# EAGLE board POC (EAGLE 7.6.0)
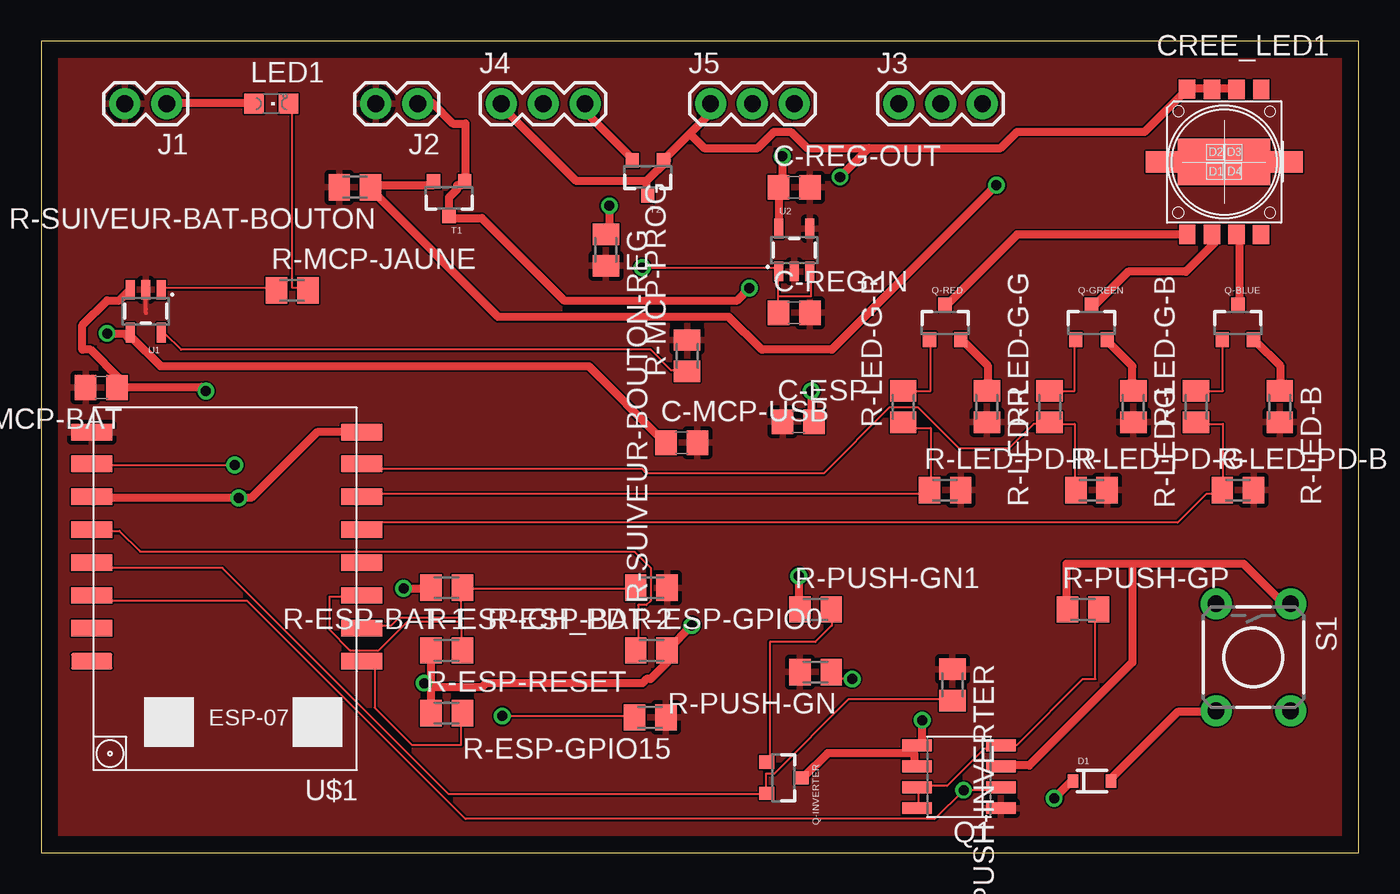
[diagram p0: board, top side]
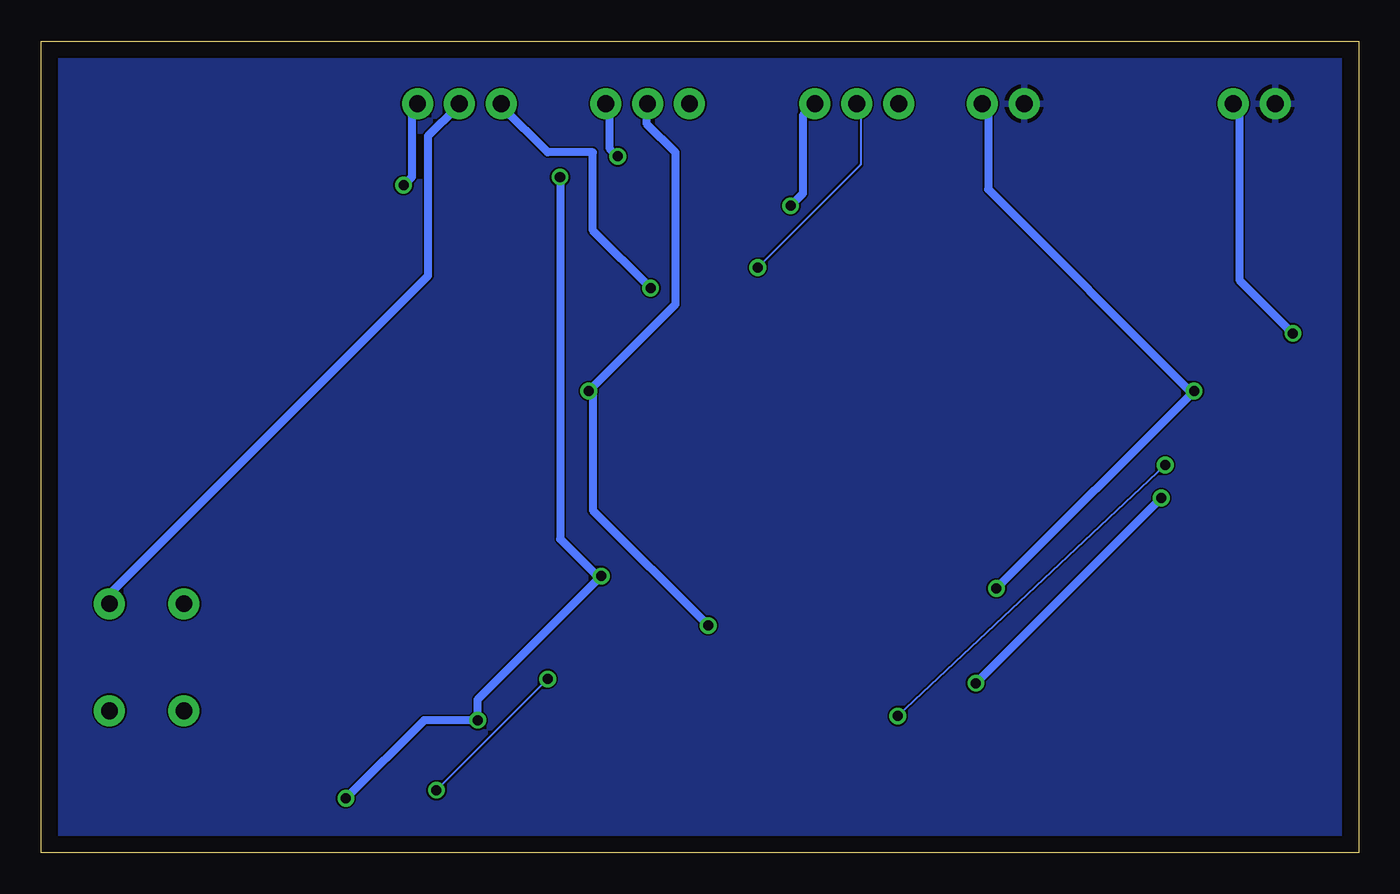
[diagram p1: board, bottom side, seen from below]

Size 80 x 49.3 mm. Coordinates in mm from the lower left corner, seen from the top.
Outline: 0,0 80,0 80,49.3 0,49.3 0,0
Copper layers (1*16): Top 0.035mm / dielectric 1.5mm / Bottom 0.035mm
Design rules "baballe": minimum track width 5mil, minimum drill 24mil, track to track 4mil, track to pad 4mil, pad to pad 4mil, via to via 4mil, smd to smd 2mil, copper to edge 40mil, drill to drill 8mil, minimum pad ring 10mil, minimum via ring 8mil, stop-mask expansion 4mil, vias tented up to drill 0mil, thermal gap 10mil
Net classes: 1 SUPPLY: width 0.5 mm, drill 0.2 mm, clearance 0.5 mm

## Footprints (pad centres in the part's own frame; a part is rotated, then mirrored left to right if it is on the bottom)
C0805 = smd 1.3 x 1.5: 1 -0.95,0; 2 0.95,0
CREE_XL_MCE = smd 1 x 1.16: 1 -2.24,4.42; 2 -0.739,4.408; 3 0.739,4.408; 4 2.256,4.408; 5 2.246,-4.408; 6 0.749,-4.399; 7 -0.739,-4.399; 8 -2.237,-4.399 | smd 5.6 x 2.84: HT 0,0 | smd 2 x 1.3: P$9 3.778,0; P$10 -3.767,0
SOD-323 = smd 0.63 x 0.83: A 1.15,0; C -1.15,0
1X02 = drill 1.016 pad 1.88: 1 0,0; 2 2.54,0
1X03 = drill 1.016 pad 1.88: 1 0,0; 2 2.54,0; 3 5.08,0
CHIPLED_0805 = smd 1.2 x 1.2: A 0,-1.05; C 0,1.05
SO08-IRF = smd 0.72 x 1.78: 1 -1.905,-2.543; 2 -0.635,-2.543; 3 0.635,-2.543; 4 1.905,-2.543; 5 1.905,2.543; 6 0.635,2.543; 7 -0.635,2.543; 8 -1.905,2.543
SOT23-3 = smd 0.8 x 0.9: 1 -0.95,-1; 2 0.95,-1; 3 0,1.1
M0805 = smd 1.3 x 1.6: 1 -0.95,0; 2 0.95,0
TACTILE-PTH = drill 1.016 pad 1.88: 1 -3.251,2.261; 2 3.251,2.261; 3 -3.251,-2.261; 4 3.251,-2.261
SOT23-5 = smd 0.55 x 1.2: 1 -0.95,-1.3; 2 0,-1.3; 3 0.95,-1.3; 4 0.95,1.3; 5 -0.95,1.3
ESP07-16PIN = smd 2.5 x 1: ADC -8.2,3.8; CH_PD -8.2,1.8; GND 8.2,-8.105; GPIO0 8.2,-2.2; GPIO2 8.2,-4.2; GPIO4 8.2,1.8; GPIO5 8.2,-0.2; GPIO12 -8.2,-4.2; GPIO13 -8.2,-6.2; GPIO14 -8.2,-2.2; GPIO15 8.2,-6.2; GPIO16 -8.2,-0.2; REST -8.2,5.8; RX 8.2,3.8; TX 8.2,5.8; VCC -8.2,-8.105

## Placement (x,y rotation side)
C-ESP  100nF  [C0805]  45.97,26.18 0 top
C-MCP-BAT  100nF  [C0805]  3.65,28.26 180 top
C-MCP-USB  100nF  [C0805]  38.89,24.91 0 top
C-REG-IN  1uF  [C0805]  45.72,32.8 0 top
C-REG-OUT  2.2uF  [C0805]  45.72,40.42 0 top
CREE_LED1  CREE_XL_MCE  [CREE_XL_MCE]  71.82,41.96 0 top
D1  250mA/100V  [SOD-323]  63.8,4.35 0 top
J1  USB  [1X02]  7.62,45.5 180 top
J2  BAT  [1X02]  22.86,45.5 180 top
J3  SELECTIONVPUSHIN  [1X03]  52.07,45.5 0 top
J4  SELECTIONVREGIN  [1X03]  27.94,45.5 0 top
J5  SELECTIONVCC  [1X03]  40.64,45.5 0 top
LED1  BAT  [CHIPLED_0805]  13.97,45.5 270 top
Q1  IRF7319  [SO08-IRF]  55.73,4.61 90 top
Q-BLUE  MOSFET-NCHANNELAO3404A  [SOT23-3]  72.66,32.18 0 top
Q-GREEN  MOSFET-NCHANNELAO3404A  [SOT23-3]  63.77,32.18 0 top
Q-INVERTER  MOSFET-PCHANNEL  [SOT23-3]  45.05,4.55 270 top
Q-RED  MOSFET-NCHANNELAO3404A  [SOT23-3]  54.88,32.18 0 top
R-ESP-BAT-1  10K  [M0805]  24.62,16.1 180 top
R-ESP-BAT-2  47K  [M0805]  37.05,16.1 180 top
R-ESP-CH_PD  10K  [M0805]  24.62,12.29 0 top
R-ESP-GPIO0  10K  [M0805]  37.05,12.29 0 top
R-ESP-GPIO15  10K  [M0805]  36.98,8.22 180 top
R-ESP-RESET  10K  [M0805]  24.62,8.48 0 top
R-LED-B  ?  [M0805]  75.2,27.1 270 top
R-LED-G  ?  [M0805]  66.31,27.1 270 top
R-LED-G-B  10K  [M0805]  70.12,27.1 90 top
R-LED-G-G  10K  [M0805]  61.23,27.1 90 top
R-LED-G-R  10K  [M0805]  52.34,27.1 90 top
R-LED-PD-B  10K  [M0805]  72.66,22.02 0 top
R-LED-PD-G  10K  [M0805]  63.77,22.02 0 top
R-LED-PD-R  10K  [M0805]  54.88,22.02 0 top
R-LED-R  ?  [M0805]  57.42,27.1 270 top
R-MCP-JAUNE  200  [M0805]  15.24,34.16 0 top
R-MCP-PROG  4.7K  [M0805]  39.22,30.19 90 top
R-PUSH-GN  10K  [M0805]  47.02,10.97 180 top
R-PUSH-GN1  10K  [M0805]  47.02,14.78 0 top
R-PUSH-GP  10K  [M0805]  63.26,14.78 0 top
R-PUSH-INVERTER  10K  [M0805]  55.33,10.2 270 top
R-SUIVEUR-BAT-BOUTON  470  [M0805]  19.05,40.42 180 top
R-SUIVEUR-BOUTON-REG  470  [M0805]  34.29,36.61 270 top
S1  SWITCH-MOMENTARY-2MOT  [TACTILE-PTH]  73.59,11.88 270 top
T1  SUIVEUR-BAT-BOUTON  [SOT23-3]  24.77,39.78 180 top
T2  SUIVEUR-BOUTON-REG  [SOT23-3]  36.83,41.05 180 top
U1  MCP73831  [SOT23-5]  6.35,32.89 180 top
U2  3.3V  [SOT23-5]  45.72,36.61 0 top
U$1  ESP07-16PIN  [ESP07-16PIN]  11.27,17.43 180 top

## Library data of the parts
C-ESP C-MCP-BAT C-MCP-USB C-REG-IN C-REG-OUT R-ESP-BAT-1 R-ESP-BAT-2 R-ESP-CH_PD R-ESP-GPIO0 R-ESP-GPIO15 R-ESP-RESET R-LED-B R-LED-G R-LED-G-B R-LED-G-G R-LED-G-R R-LED-PD-B R-LED-PD-G R-LED-PD-R R-LED-R R-MCP-JAUNE R-MCP-PROG R-PUSH-GN R-PUSH-GN1 R-PUSH-GP R-PUSH-INVERTER R-SUIVEUR-BAT-BOUTON R-SUIVEUR-BOUTON-REG = resistor
CREE_LED1 = CreeXL-MC-E
D1 = SparkFun-DiscreteSemi; PROD_ID: DIO-09646
J1-J5 = SparkFun-Connectors
LED1 = led
Q1 = lio
Q-BLUE Q-GREEN Q-RED = SparkFun-DiscreteSemi; PROD_ID: TRAN-12988
Q-INVERTER = SparkFun-DiscreteSemi; PROD_ID: TRANS-08285
S1 = SparkFun-Electromechanical
T1 T2 = SparkFun-DiscreteSemi; PROD_ID: TRANS-08049
U1 = SparkFun-PowerIC; PROD_ID: IC-09995
U2 = SparkFun-PowerIC; PROD_ID: VREG-12457
U$1 = esp8266modules; DIMENSIONS: 22.0 x 16.0 mm; PINS: 16; PITCH: 0.078" / 2 mm

## Nets
ADC: R-ESP-BAT-1.1 R-ESP-BAT-2.2 U$1.ADC
GND: C-ESP.1 C-MCP-BAT.2 C-MCP-USB.2 C-REG-IN.2 C-REG-OUT.2 J1.2 J2.2 Q1.1 R-ESP-BAT-2.1 R-ESP-GPIO15.1 R-LED-B.2 R-LED-G.2 R-LED-PD-B.2 R-LED-PD-G.2 R-LED-PD-R.2 R-LED-R.2 R-MCP-PROG.2 R-PUSH-GN.2 R-PUSH-INVERTER.1 R-SUIVEUR-BAT-BOUTON.2 R-SUIVEUR-BOUTON-REG.2 U1.2 U2.2 U2.4 U$1.GND
GPIO4: Q1.2 R-PUSH-GN.1 U$1.GPIO4
GPIO5: Q-INVERTER.2 R-PUSH-INVERTER.2 U$1.GPIO5
GPIO12: R-LED-G-R.1 R-LED-PD-R.1 U$1.GPIO12
GPIO13: R-LED-G-G.1 R-LED-PD-G.1 U$1.GPIO13
GPIO14: R-LED-G-B.1 R-LED-PD-B.1 U$1.GPIO14
N$1: R-ESP-GPIO15.2 U$1.GPIO15
N$2: R-ESP-GPIO0.1 U$1.GPIO0
N$4: R-ESP-CH_PD.2 U$1.CH_PD
N$5: R-ESP-RESET.2 U$1.REST
N$6: R-MCP-PROG.1 U1.5
N$7: R-MCP-JAUNE.1 U1.1
N$8: LED1.C R-MCP-JAUNE.2
N$9: Q1.4 Q1.7 Q1.8 R-PUSH-GP.2
N$10 [SUPPLY]: D1.A S1.4
N$11: Q-INVERTER.1 R-PUSH-GN1.2
N$12: C-REG-IN.1 J4.2 U2.1 U2.3
N$13 [SUPPLY]: CREE_LED1.8 Q-RED.3
N$14 [SUPPLY]: CREE_LED1.7 Q-GREEN.3
N$15 [SUPPLY]: CREE_LED1.6 Q-BLUE.3
N$18 [SUPPLY]: Q-BLUE.2 R-LED-B.1
N$19 [SUPPLY]: Q-GREEN.2 R-LED-G.1
N$20 [SUPPLY]: Q-RED.2 R-LED-R.1
N$21: Q-RED.1 R-LED-G-R.2
N$22: Q-GREEN.1 R-LED-G-G.2
N$23: Q-BLUE.1 R-LED-G-B.2
VBAT [SUPPLY]: C-MCP-BAT.1 J2.1 J3.1 R-ESP-BAT-1.2 T1.1 T1.3 U1.3
VBAT_S [SUPPLY]: J3.3 R-SUIVEUR-BAT-BOUTON.1 T1.2
VCC [SUPPLY]: C-REG-OUT.1 J5.3 U2.5
VCC-ESP [SUPPLY]: C-ESP.2 J5.2 R-ESP-CH_PD.1 R-ESP-GPIO0.2 R-ESP-RESET.1 U$1.GPIO2 U$1.VCC
VIN [SUPPLY]: CREE_LED1.1 CREE_LED1.2 CREE_LED1.3 D1.C J4.1 J5.1 Q1.5 Q1.6 Q-INVERTER.3 R-PUSH-GN1.1 T2.1 T2.3
VIN_S [SUPPLY]: J4.3 R-SUIVEUR-BOUTON-REG.1 T2.2
VPUSH_IN [SUPPLY]: J3.2 Q1.3 R-PUSH-GP.1 S1.1
VUSB [SUPPLY]: C-MCP-USB.1 J1.1 LED1.A U1.4

## Tracks (layer width: path | path; a pad name or v marks a point on that pad's centre or on a via)
ADC
  Top 0.127: U$1.ADC 19.5,13.8 21.25,13.8 21.75,14.3 25.5,14.3 25.5,16.05 R-ESP-BAT-1.1 25.75,16.05 36,16.05 R-ESP-BAT-2.2
GND
  Top 0.254: U1.2 6.35,32.8 6.35,33
  pour Bottom: 0,49.31 80.01,49.31 80.01,0 0,0
  pour Top: 0,49.31 80.01,49.31 80.01,0 0,0
GPIO4  (via drill 0.61)
  Top 0.127: v49.25,10.55 48.25,10.55 48,10.8 R-PUSH-GN.1 | Q1.2 58.25,3.8 v56,3.8 54.25,2.05 25.75,2.05 12.5,15.3 3.5,15.3 3.25,15.55 U$1.GPIO4
  Bottom 0.127: v56,3.8 v49.25,10.55
GPIO5
  Top 0.127: R-PUSH-INVERTER.2 55.25,9.3 49,9.3 44.5,4.8 44,4.8 44,3.8 Q-INVERTER.2 44,3.55 24.75,3.55 11,17.3 3.5,17.3 3.25,17.55 U$1.GPIO5
GPIO12
  Top 0.127: R-LED-G-R.1 52.5,26.05 52.75,25.8 54,25.8 54,22.05 R-LED-PD-R.1 53.75,21.8 19.5,21.8 U$1.GPIO12
  Top 0.254: R-LED-G-R.1
GPIO13
  Top 0.127: R-LED-PD-G.1 62.75,22.05 62.75,26.05 61.25,26.05 R-LED-G-G.1 61,26.05 60.25,26.05 58.75,24.55 55.75,24.55 53.25,27.05 51.5,27.05 47.5,23.05 36.75,23.05 36.5,23.3 19.75,23.3 19.5,23.55 U$1.GPIO13
GPIO14
  Top 0.127: R-LED-G-B.1 70.25,26.05 71.75,26.05 71.75,22.05 R-LED-PD-B.1 71.5,21.8 70.75,21.8 69,20.05 19.75,20.05 19.5,19.8 U$1.GPIO14
N$1  (via drill 0.61)
  Top 0.127: v28,8.3 36,8.3 R-ESP-GPIO15.2 | v11.75,23.55 3.25,23.55 U$1.GPIO15
  Bottom 0.127: v11.75,23.55 v28,8.3
N$2
  Top 0.127: R-ESP-GPIO0.1 36.25,12.3 36.25,15.05 36.75,15.05 37,15.3 37,17.3 36,18.3 6,18.3 4.75,19.55 3.25,19.55 U$1.GPIO0
N$4
  Top 0.127: R-ESP-CH_PD.2 25.5,12.3 25.5,14.05 22.25,14.05 20.5,12.3 18.75,12.3 17.5,13.55 17.5,15.55 19.25,15.55 U$1.CH_PD
N$5
  Top 0.127: R-ESP-RESET.2 25.5,8.3 25.5,6.55 22.5,6.55 20.25,8.8 20.25,11.55 19.5,11.55 U$1.REST
N$6
  Top 0.127: U1.5 7.5,31.55 8.5,30.55 37,30.55 38.25,29.3 39,29.3 R-MCP-PROG.1
N$7
  Top 0.127: U1.1 7.5,34.3 14.25,34.3 R-MCP-JAUNE.1
N$8
  Top 0.127: LED1.C 15.25,45.3 15.25,34.3 16,34.3 R-MCP-JAUNE.2
N$9
  Top 0.127: Q1.8 53.25,2.8 53.25,3.8 Q1.7 53.25,4.05 55,4.05 57.25,6.3 58.25,6.3 Q1.4 58.5,6.55 59.25,6.55 63.25,10.55 64,10.55 64,14.55 R-PUSH-GP.2
N$10
  Top 0.5: D1.A 65,4.55 69,8.55 71.25,8.55 S1.4
N$11
  Top 0.127: Q-INVERTER.1 44.25,5.55 44.25,12.8 47,12.8 48,13.8 48,14.55 R-PUSH-GN1.2
N$12  (via drill 0.61)
  Top 0.127: 44.75,33.8 44.75,32.8 C-REG-IN.1 | 44.75,33.8 44.75,35.3 U2.1 44.75,35.55 v36.5,35.55 | 44.75,33.8 46.75,33.8 46.75,35.3 U2.3
  Bottom 0.127: v36.5,35.55 30.25,41.8 30.25,45.3 J4.2
N$13
  Top 0.5: Q-RED.3 55,33.3 59.25,37.55 69.5,37.55 CREE_LED1.8
N$14
  Top 0.5: Q-GREEN.3 64,33.3 66,35.3 69.5,35.3 71.25,37.05 71.25,37.55 CREE_LED1.7
N$15
  Top 0.5: Q-BLUE.3 72.75,33.3 72.75,37.55 CREE_LED1.6
N$18
  Top 0.5: Q-BLUE.2 73.75,31.05 75.25,29.55 75.25,28.05 R-LED-B.1
N$19
  Top 0.5: Q-GREEN.2 64.75,31.05 66.25,29.55 66.25,28.05 R-LED-G.1
N$20
  Top 0.5: Q-RED.2 56,31.05 57.5,29.55 57.5,28.05 R-LED-R.1
N$21
  Top 0.127: R-LED-G-R.2 54,28.05 54,31.05 Q-RED.1
N$22
  Top 0.127: R-LED-G-G.2 62.75,28.05 62.75,31.05 Q-GREEN.1
N$23
  Top 0.127: R-LED-G-B.2 71.75,28.05 71.75,31.05 Q-BLUE.1
VBAT  (via drill 0.61)
  Top 0.5: U1.3 5.25,34.05 4.75,33.55 4,33.55 2.5,32.05 2.5,30.55 3,30.55 4.75,28.8 4.75,28.3 C-MCP-BAT.1 5,28.3 9.75,28.3 v10,28.05 | v22,16.05 23.5,16.05 R-ESP-BAT-1.2 | J2.1 23,45.55 23.75,45.55 25,44.3 25.75,44.3 25.75,40.8 T1.1 25.5,40.55 25.25,40.55 25.25,40.3 24.75,39.8 24.75,38.8 T1.3 25,38.55 26.75,38.55 31.75,33.55 42.25,33.55 v43,34.3
  Bottom 0.5: v22,16.05 v10,28.05 10.25,28.05 22.5,40.3 22.5,45.05 22.75,45.3 J2.1 | v43,34.3 46.5,37.8 46.5,42.55 49.25,42.55 52,45.3 J3.1
VBAT_S  (via drill 0.61)
  Top 0.5: T1.2 23.75,40.55 20,40.55 R-SUIVEUR-BAT-BOUTON.1 20,40.3 27.75,32.55 41.75,32.55 43.75,30.55 48,30.55 v58,40.55
  Bottom 0.5: v58,40.55 57.5,41.05 57.5,45.05 57.25,45.3 J3.3
VCC  (via drill 0.61)
  Top 0.5: U2.5 44.77,38.2 C-REG-OUT.1 45,40.55 v45,42.3
  Bottom 0.5: v45,42.3 45.5,42.8 45.5,45.3 J5.3
VCC-ESP  (via drill 0.61)
  Top 0.5: 23.67,10.3 R-ESP-CH_PD.1 | 23.67,10.3 23.67,10.05 | 23.67,10.05 R-ESP-RESET.1 | U$1.GPIO2 3.25,21.55 v12,21.55 12.75,21.55 16.75,25.55 19.25,25.55 U$1.VCC | v46.75,28.05 46.75,26.3 C-ESP.2 | v39.5,13.8 R-ESP-GPIO0.2 38,11.55 37,10.55 36.75,10.55 36.5,10.3 27,10.3 26.75,10.05 23.67,10.05 | 23.67,10.3 v23.25,10.3
  Bottom 0.5: J5.2 43.25,45.3 43.25,44.3 41.5,42.55 41.5,33.3 v46.75,28.05 46.5,28.05 46.5,20.8 v39.5,13.8 | v23.25,10.3 v12,21.55
VIN  (via drill 0.61)
  Top 0.5: CREE_LED1.3 72.39,46.45 71.12,46.45 CREE_LED1.2 70.8,46.45 69.85,46.45 CREE_LED1.1 69.5,46.3 67,43.8 59.25,43.8 58.25,42.8 50.25,42.8 | v61.5,3.3 62.5,4.3 D1.C | v53.5,8.05 53.5,6.55 53.25,6.55 Q1.5 53,6.3 52.88,6.18 | 52.88,6.18 52.75,6.05 47.75,6.05 46.25,4.55 Q-INVERTER.3 | v46,16.8 46,14.8 R-PUSH-GN1.1 | Q1.6 53,5.3 53,6.05 52.88,6.18 | 36.75,40.8 36.75,40.05 T2.3 | 36.75,40.8 38,42.05 T2.1 38,42.3 39.38,43.67 | 39.38,43.67 40.5,44.8 40.5,45.3 J5.1 | 50.25,42.8 46.5,42.8 45.5,43.8 44.5,43.8 43.5,42.8 40.25,42.8 39.38,43.67 | 36.75,40.8 32.5,40.8 28,45.3 J4.1 | 50.25,42.8 v48.5,41.05
  Bottom 0.5: v61.5,3.3 56.75,8.05 v53.5,8.05 53.5,9.3 v46,16.8 46.25,16.8 48.5,19.05 v48.5,41.05
VIN_S  (via drill 0.61)
  Top 0.5: T2.2 35.75,42.3 33.25,44.8 33.25,45.3 J4.3 | v34.5,39.3 34.5,37.8 R-SUIVEUR-BOUTON-REG.1
  Bottom 0.5: v34.5,39.3 33.75,40.05 33.75,44.8 33.25,45.3 J4.3
VPUSH_IN
  Top 0.5: 66.25,17.55 73,17.55 75.25,15.3 75.75,15.3 S1.1 | 66.25,17.55 62.25,17.55 62.25,14.8 R-PUSH-GP.1 | 66.25,17.55 66.25,11.55 60,5.3 58.5,5.3 Q1.3
  Bottom 0.5: J3.2 54.75,45.3 56.5,43.55 56.5,35.05 75.75,15.8 75.75,15.3 S1.1
VUSB  (via drill 0.61)
  Top 0.5: v4,31.55 5.25,31.55 U1.4 5.25,31.3 5.5,31.3 7.25,29.55 33.25,29.55 37.75,25.05 C-MCP-USB.1 | LED1.A 12.75,45.55 7.75,45.55 J1.1
  Bottom 0.5: v4,31.55 7.25,34.8 7.25,45.05 7.5,45.3 J1.1